# Altium PCB 线圈3.PcbDoc
Units mm, origin at the board's own origin, x right, y up, seen from the top; angles counter-clockwise.
Board outline 152.4 x 101.6 mm, 2 copper layers (Top Layer, Bottom Layer); 1 components, 1 nets, 2 pads, 2 vias.
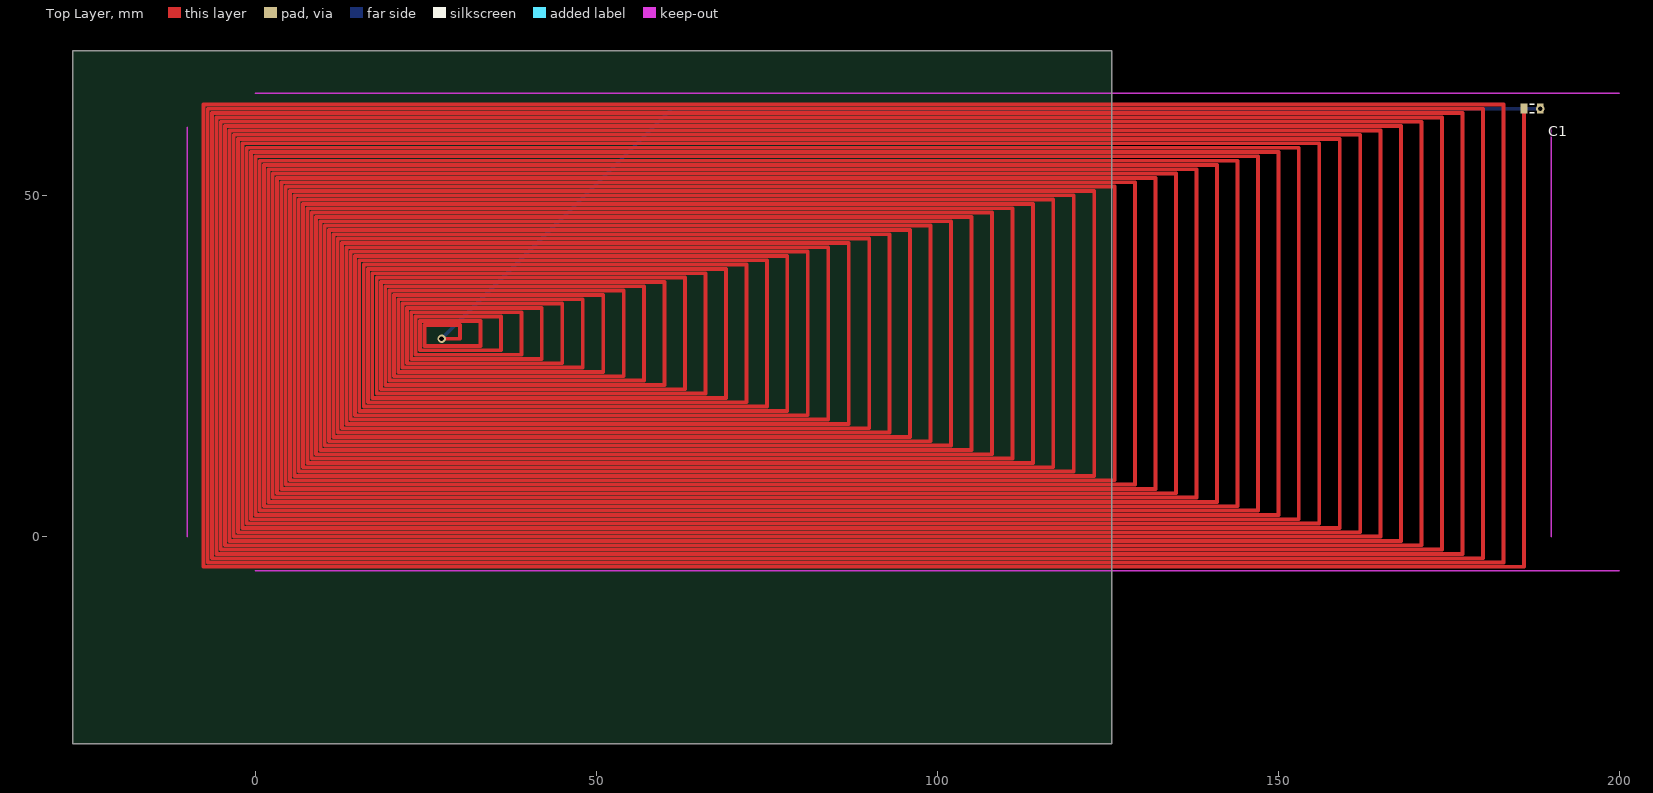
[diagram p0: Top Layer view]
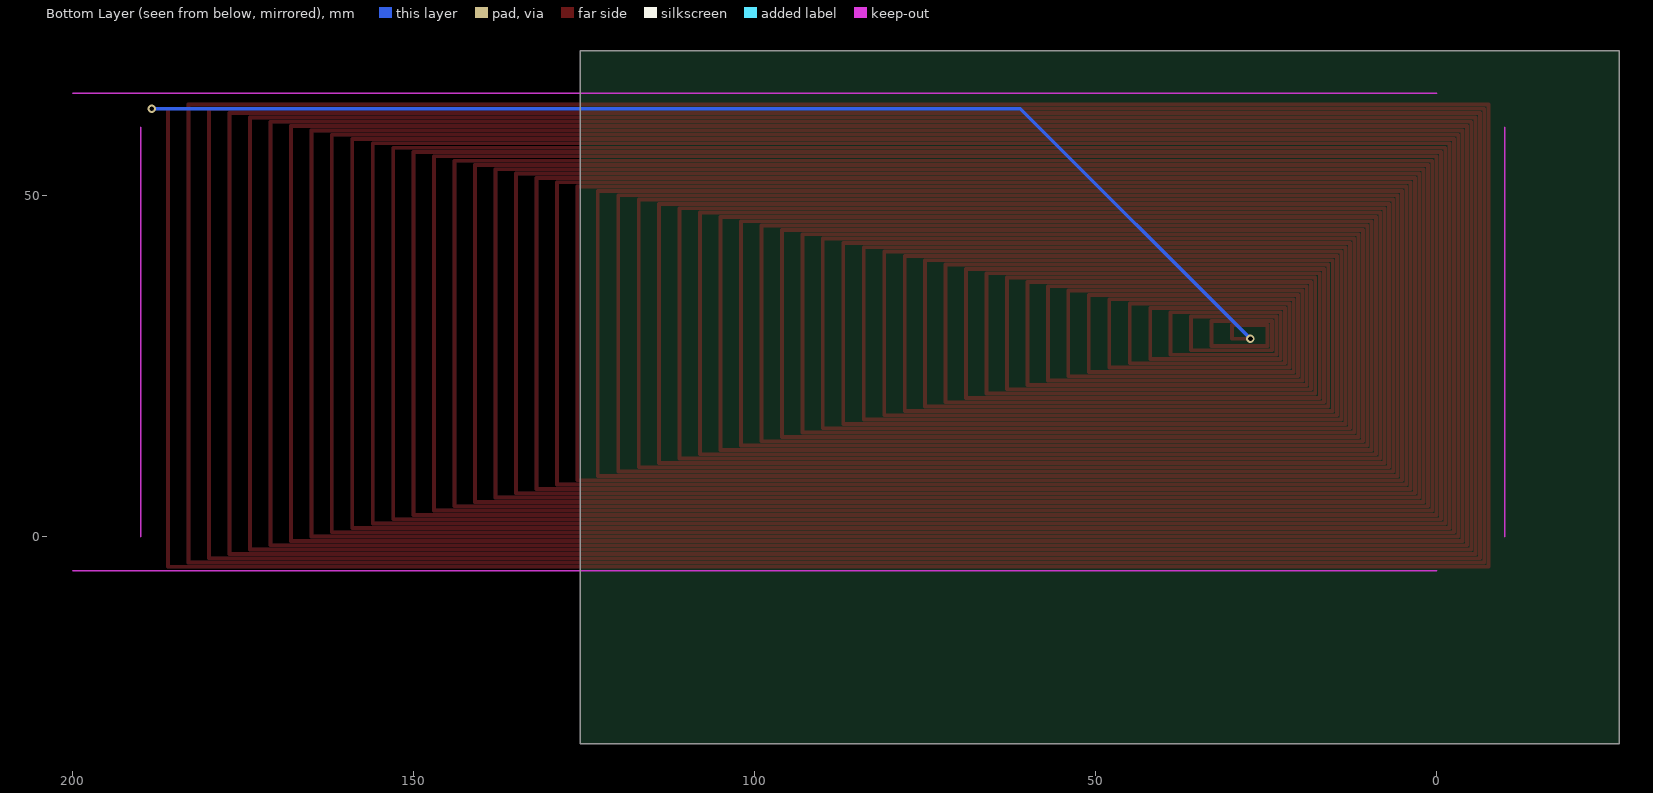
[diagram p1: Bottom Layer view, seen from below]

## Layer stack, top to bottom
Top Layer: signal copper 0.0356
Dielectric: dielectric 0.32, FR-4, Dk 4.8
Bottom Layer: signal copper 0.0356

## Board outline
-26.797,-30.353 125.603,-30.353 125.603,71.247 -26.797,71.247

## Design rules (kind name [scope] priority, off if disabled: settings)
Clearance [All] p1: gap=0.152
PolygonConnect [All] p1: connectstyle=Relief reliefconductorwidth=0.254 reliefentries=4 polygonreliefangle="90 Angle" airgapwidth=0.254
RoutingVias [All] p1: holewidth=0.711 width=1.27 viastyle="Through Hole" minholewidth=0.711 minwidth=1.27 maxholewidth=0.711 maxwidth=1.27
SolderMaskExpansion [All] p1: expansion=0.102
Width [All] p1: maxlimit=1.27 minlimit=0.254 preferedwidth=0.508 minimp=50.000000 maximp=50.000000 favimp=50.000000
28 further rules are at their usual default settings.

## Components (designator, comment, footprint, x,y, rotation, side; value= is the part's Value field where it differs from the comment)
C1 "Cap" C2012 187.198,62.738 r0 top

## Footprints (in the part's own frame and the unit in brackets; to place one, negate y for a bottom-side part, rotate by r counter-clockwise, add the part's x,y. Pads: shape width x height; smd on the part's side, far side on the other; paste and mask are expansions set on the pad)
C2012 [mm] "Chip Capacitor, 2-Leads, Body 2.0x1.2mm, IPC Low Density"
  rect 1x1.45 smd: 1(-1.2,0) 2(1.2,0)
  silkscreen extent -0.3,-0.63 0.3,0.63, body extent -0.98,-0.6 1.02,0.6, height 0.5

## Part data
C1: "Capacitor"

## Via types
v1: diameter 1.27, hole 0.711, Top Layer to Bottom Layer, 2 vias

## Nets (pads, with @x,y where several pads share a name; then routed paths per layer and width w, separated by ;. In a path a pad name is that pad's centre, name@x,y a point inside that pad or via, vN(x,y) a via of type N, cw(c..) or ccw(c..) an arc to the next point about the centre after c; other vN are vias at no path point)
LINE: C1.1 C1.2 | length 14236.7
  Top Layer w0.559: v1@27.559,29 30,29 30,31 24.777,31 24.777,27.952 24.789,27.94 33,27.94 33,31.623 24.13,31.623 24.13,27.305 36,27.305 36,32.258 23.495,32.258 23.495,26.67 39,26.67 39,32.893 22.86,32.893 22.86,26.035 42,26.035 42,33.528 22.225,33.528 22.225,25.4 45,25.4 45,34.163 21.59,34.163 21.59,24.765 48,24.765 48,34.798 20.955,34.798 20.955,24.13 51,24.13 51,35.433 20.32,35.433 20.32,23.495 54,23.495 54,36.068 19.685,36.068 19.685,22.86 57,22.86 57,36.703 19.05,36.703 19.05,22.225 60,22.225 60,37.338 18.415,37.338 18.415,21.59 63,21.59 63,37.973 17.78,37.973 17.78,20.955 66,20.955 66,38.608 17.145,38.608 17.145,20.32 69,20.32 69,39.243 16.51,39.243 16.51,19.685 72,19.685 72,39.878 15.875,39.878 15.875,19.05 75,19.05 75,40.513 15.24,40.513 15.24,18.415 78,18.415 78,41.148 14.605,41.148 14.605,17.78 81,17.78 81,41.783 13.97,41.783 13.97,17.145 84,17.145 84,42.418 13.335,42.418 13.335,16.51 87,16.51 87,43.053 12.7,43.053 12.7,15.875 90,15.875 90,43.688 12.065,43.688 12.065,15.24 93,15.24 93,44.323 11.43,44.323 11.43,14.605 96,14.605 96,44.958 10.795,44.958 10.795,13.97 99,13.97 99,45.593 10.16,45.593 10.16,13.335 102,13.335 102,46.228 9.525,46.228 9.525,12.7 105,12.7 105,46.863 8.89,46.863 8.89,12.065 108,12.065 108,47.498 8.255,47.498 8.255,11.43 111,11.43 111,48.133 7.62,48.133 7.62,10.795 114,10.795 114,48.768 6.985,48.768 6.985,10.16 117,10.16 117,49.403 6.35,49.403 6.35,9.525 120,9.525 120,50.038 5.715,50.038 5.715,8.89 123,8.89 123,50.673 5.08,50.673 5.08,8.255 126,8.255 126,51.308 4.445,51.308 4.445,7.62 129,7.62 129,51.943 3.81,51.943 3.81,6.985 132,6.985 132,52.578 3.175,52.578 3.175,6.35 135,6.35 135,53.213 2.54,53.213 2.54,5.715 138,5.715 138,53.848 1.905,53.848 1.905,5.08 141,5.08 141,54.483 1.27,54.483 1.27,4.445 144,4.445 144,55.118 0.635,55.118 0.635,3.81 147,3.81 147,55.753 0,55.753 0,3.175 150,3.175 150,56.388 -0.635,56.388 -0.635,2.54 153,2.54 153,57.023 -1.27,57.023 -1.27,1.905 156,1.905 156,57.658 -1.905,57.658 -1.905,1.27 159,1.27 159,58.293 -2.54,58.293 -2.54,0.635 162,0.635 162,58.928 -3.175,58.928 -3.175,0 165,0 165,59.563 -3.81,59.563 -3.81,-0.635 168,-0.635 168,60.198 -4.445,60.198 -4.445,-1.27 171,-1.27 171,60.833 -5.08,60.833 -5.08,-1.905 174,-1.905 174,61.468 -5.715,61.468 -5.715,-2.54 177,-2.54 177,62.103 -6.35,62.103 -6.35,-3.175 180,-3.175 180,62.738 -6.985,62.738 -6.985,-3.81 183,-3.81 183,63.373 -7.62,63.373 -7.62,-4.441 186,-4.441 C1.1@186,62.683
  Bottom Layer w0.559: v1(27.305,29) 61.043,62.738 v1(188.398,62.738)

## Keep-outs
Keep-Out Layer:
  lines w0.254: -10,0 -10,60 ; 0,-5 200,-5 ; 0,65 200,65 ; 190,0 190,60